# EAGLE board xbee_usb (EAGLE 4.16)
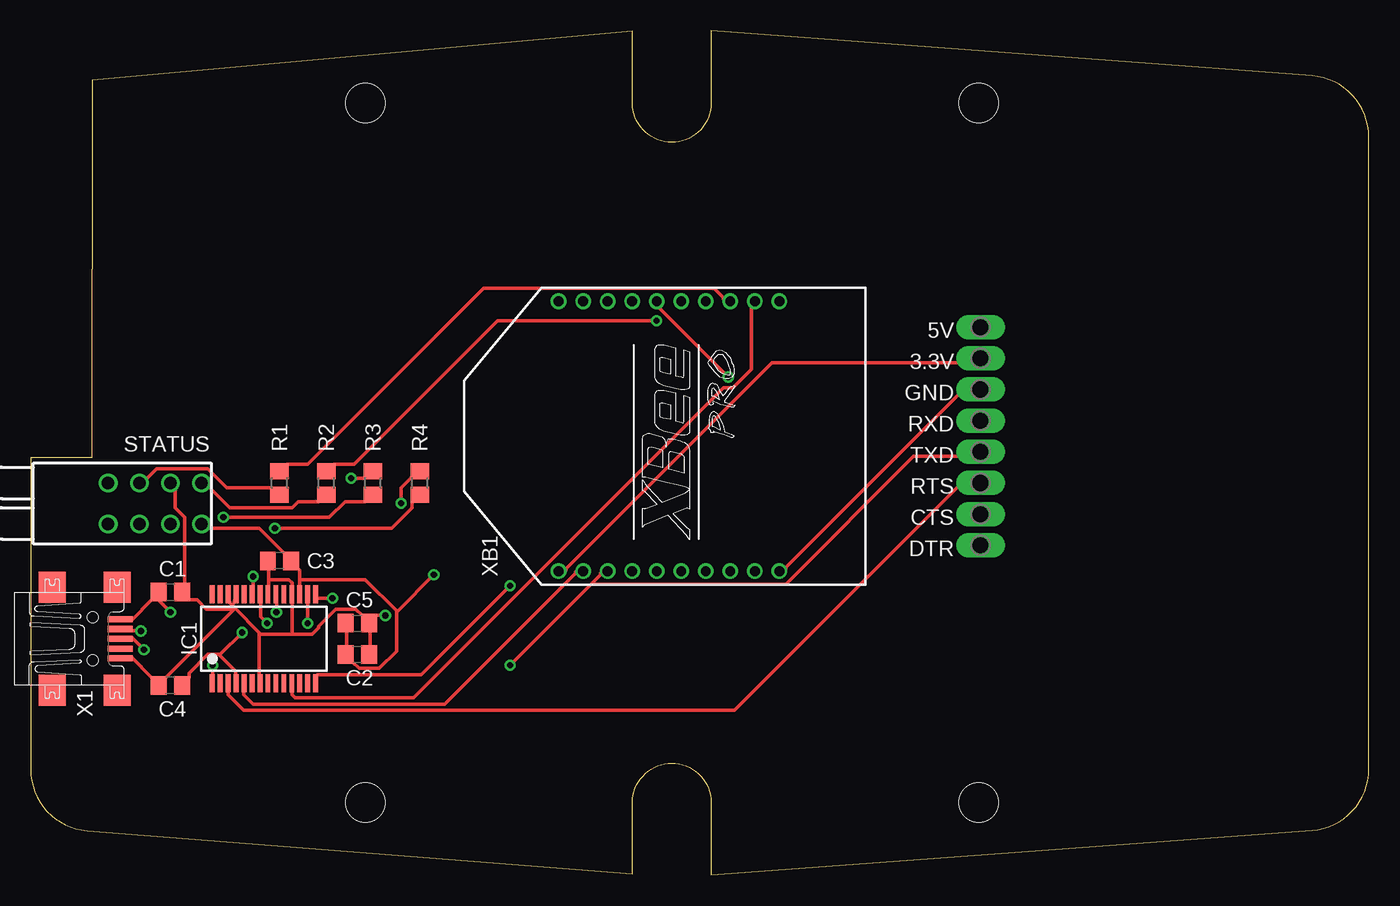
[diagram p0: board, top side]
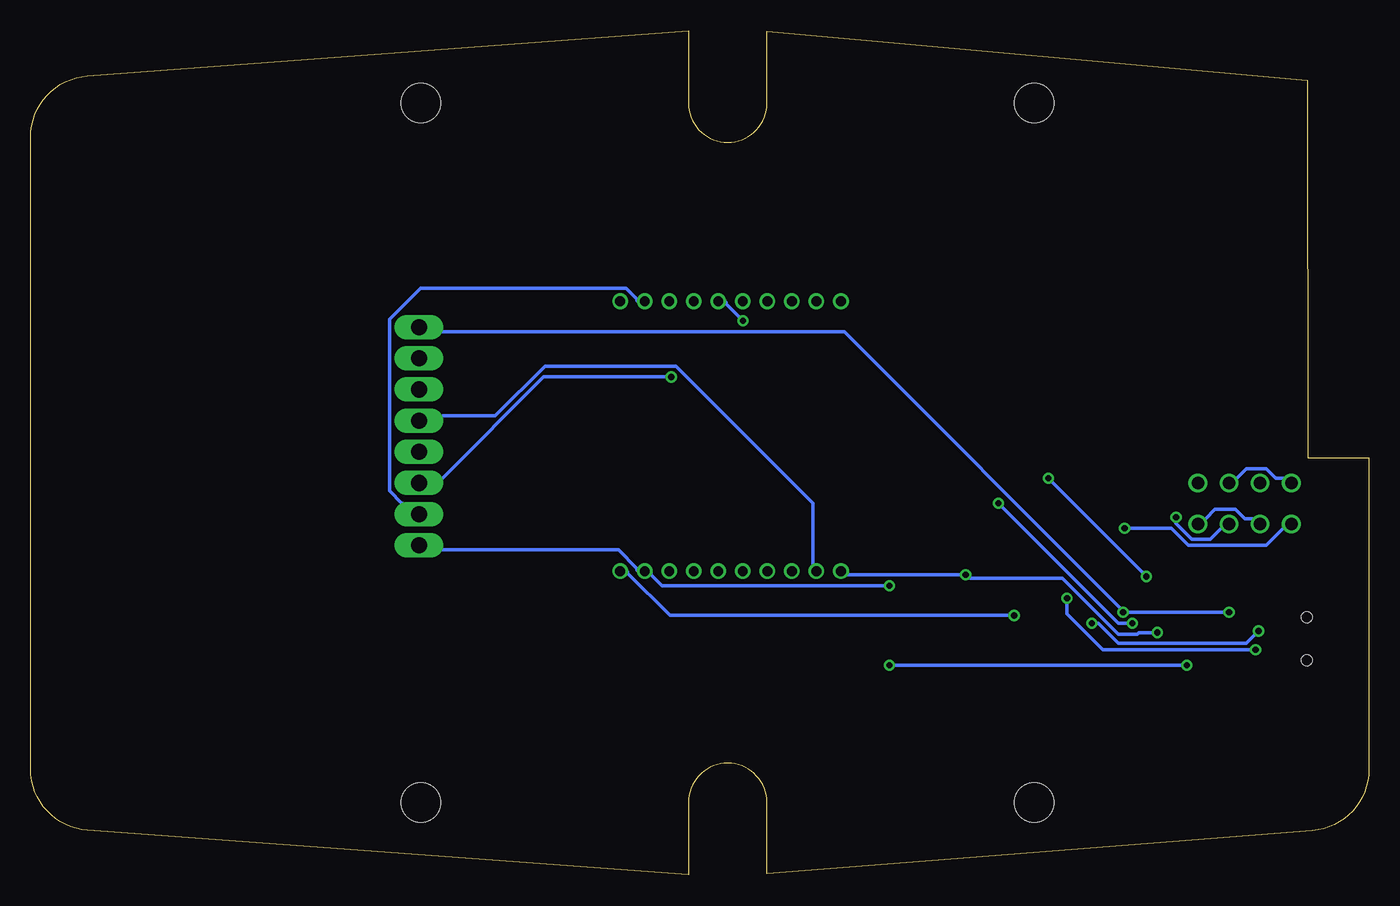
[diagram p1: board, bottom side, seen from below]

Size 109.1 x 68.8 mm. Coordinates in mm from the lower left corner, seen from the top.
Outline: 49.07,0.07 49.07,5.9 arc-90 52.27,9.1 arc-90 55.47,5.9 55.47,0 104.47,3.63 arc86 109.1,8.61 109.1,60.13 arc86 104.47,65.12 55.47,68.8 55.47,62.9 arc-90 52.27,59.7 arc-90 49.07,62.9 49.07,68.77 5,64.77 4.97,34 0,34 0,8.59 arc85 4.6,3.6 49.07,0.07
Copper layers (1*16): Top 0.0178mm / dielectric 1.4986mm / Bottom 0.0178mm
Design rules "Sunstone2layerbeta_v1.1": minimum track width 6mil, minimum drill 14mil, track to track 6mil, track to pad 6mil, pad to pad 6mil, via to via 6mil, smd to smd 6mil, copper to edge 0mil, drill to drill 16mil, minimum pad ring 8mil, minimum via ring 8mil, stop-mask expansion 3mil, vias tented up to drill 0mil, thermal gap 10mil
Net classes: 0 default: width 0.305 mm, drill 0.203 mm, clearance 0.508 mm
Holes 3.2 mm at 27.27,5.9 27.27,62.9 77.27,5.9 77.27,62.9

## Footprints (pad centres in the part's own frame; a part is rotated, then mirrored left to right if it is on the bottom)
P1-13Y = drill 1.321 pad 1.905 long: 1 0,0
C0805 = smd 1.3 x 1.5: 1 -0.95,0; 2 0.95,0
SSOP28 = smd 0.4 x 1.5: 1 -4.225,-3.625; 2 -3.575,-3.625; 3 -2.925,-3.625; 4 -2.275,-3.625; 5 -1.625,-3.625; 6 -0.975,-3.625; 7 -0.325,-3.625; 8 0.325,-3.625; 9 0.975,-3.625; 10 1.625,-3.625; 11 2.275,-3.625; 12 2.925,-3.625; 13 3.575,-3.625; 14 4.225,-3.625; 15 4.225,3.625; 16 3.575,3.625; 17 2.925,3.625; 18 2.275,3.625; 19 1.625,3.625; 20 0.975,3.625; 21 0.325,3.625; 22 -0.325,3.625; 23 -0.975,3.625; 24 -1.625,3.625; 25 -2.275,3.625; 26 -2.925,3.625; 27 -3.575,3.625; 28 -4.225,3.625
R0805 = smd 1.3 x 1.5: 1 -0.95,0; 2 0.95,0
569-010*-* = drill 1.016 round: P$1 3.353,0; P$2 3.353,2.54; P$3 3.353,5.08; P$4 3.353,7.62; P$5 0,0; P$6 0,2.54; P$7 0,5.08; P$8 0,7.62
UX60-MB-5ST = smd 2 x 0.5: 1 2.25,1.6; 2 2.25,0.8; 3 2.25,0; 4 2.25,-0.8; 5 2.25,-1.6 | smd 2.2 x 2.5: M1 -3.3,-4.2; M2 -3.3,4.2; M3 2,4.2; M4 2,-4.2 | hole 0.9: 0,-1.75; 0,1.75
XBEE-PRO = drill 0.8 pad 1.27 round: 1 -11,9; 2 -11,7; 3 -11,5; 4 -11,3; 5 -11,1; 6 -11,-1; 7 -11,-3; 8 -11,-5; 9 -11,-7; 10 -11,-9; 11 11,-9; 12 11,-7; 13 11,-5; 14 11,-3; 15 11,-1; 16 11,1; 17 11,3; 18 11,5; 19 11,7; 20 11,9

## Placement (x,y rotation side)
3.3V  PTR1PAD1-13Y  [P1-13Y]  77.44,42.1 270 top
5V  PTR1PAD1-13Y  [P1-13Y]  77.44,44.64 270 top
C1  10nF  [C0805]  11.4,23.05 0 top
C2  100nF  [C0805]  26.64,17.97 0 top
C3  100nF  [C0805]  20.29,25.59 180 top
C4  100nF  [C0805]  11.4,15.43 180 top
C5  4.7uF  [C0805]  26.64,20.51 0 top
CTS  PTR1PAD1-13Y  [P1-13Y]  77.44,29.4 270 top
DTR  PTR1PAD1-13Y  [P1-13Y]  77.44,26.86 270 top
GND  PTR1PAD1-13Y  [P1-13Y]  77.44,39.56 270 top
IC1  FT232RL  [SSOP28]  19.02,19.24 0 top
R1  [R0805]  20.29,31.94 90 top
R2  [R0805]  24.1,31.94 90 top
R3  [R0805]  27.91,31.94 90 top
R4  [R0805]  31.72,31.94 90 top
RTS  PTR1PAD1-13Y  [P1-13Y]  77.44,31.94 270 top
RXD  PTR1PAD1-13Y  [P1-13Y]  77.44,37.02 270 top
STATUS  569-010-*  [569-010*-*]  6.32,31.94 270 top
TXD  PTR1PAD1-13Y  [P1-13Y]  77.44,34.48 270 top
X1  MINI-USB-UX60-MB-5ST  [UX60-MB-5ST]  5.05,19.24 0 top
XB1  XBEE-PRO  [XBEE-PRO]  52.04,35.75 90 top

## Library data of the parts
3.3V 5V CTS DTR GND RTS RXD TXD = testpad
C1-C5 R1-R4 = rcl
IC1 = ftdichip
STATUS XB1 = radish
X1 = con-hirose

## Nets
GND: C1.2 C2.2 C3.2 C4.2 C5.2 GND.1 IC1.7 IC1.18 IC1.21 IC1.25 IC1.26 STATUS.P$5 STATUS.P$7 X1.5 XB1.10
N$1: IC1.16 X1.2
N$2: IC1.15 X1.3
N$3: R1.1 STATUS.P$6
N$4: IC1.1 TXD.1 XB1.3
N$5: IC1.5 RXD.1 XB1.2
N$6: R1.2 XB1.13
N$7: R2.1 STATUS.P$8
N$11: R2.2 XB1.15
N$13: DTR.1 IC1.14 XB1.9
N$14: IC1.3 RTS.1 XB1.16
N$15: CTS.1 IC1.11 XB1.12
N$16: R4.1 STATUS.P$1
N$17: 5V.1 C1.1 IC1.20 X1.1
N$18: R3.1 STATUS.P$3
N$19: IC1.23 R3.2
N$20: IC1.22 R4.2
VCC: 3.3V.1 C2.1 C3.1 C4.1 C5.1 IC1.4 IC1.17 STATUS.P$2 STATUS.P$4 XB1.1

## Tracks (layer width: path | path; a pad name or v marks a point on that pad's centre or on a via)
GND  (via drill 0.51)
  Top 0.305: GND.1 75.66,39.18 61.56,25.08 61.56,24.95 XB1.10 | X1.5 8.23,17.72 9.88,16.06 C4.2 11.02,16.06 16.48,21.53 16.48,21.65 | 19.4,24.07 19.4,23.56 IC1.21 | 19.4,24.07 19.4,24.95 C3.2 | 19.4,24.07 21.05,24.07 21.31,23.81 21.31,23.56 IC1.18 21.31,22.16 21.31,19.62 | C2.2 27.66,18.61 27.66,19.88 C5.2 | 18.64,19.62 18.64,19.75 16.67,21.72 | 18.64,19.62 18.64,16.32 IC1.7 | 16.42,21.97 16.23,22.16 IC1.26 | 16.67,21.72 16.42,21.97 | IC1.25 16.61,22.16 16.42,21.97 | 16.48,21.65 16.61,21.65 16.67,21.72 | 16.48,21.65 14.32,21.65 13.56,22.41 12.92,22.41 C1.2 12.54,23.68 12.54,29.15 11.78,29.91 11.78,31.3 STATUS.P$7 | 21.31,19.62 22.96,19.62 23.46,20.13 23.46,20.26 24.86,21.65 26.51,21.65 27.02,21.14 C5.2 | 18.64,19.62 21.31,19.62 | v28.93,21.14 28.16,21.14 C5.2
  Bottom 0.305: STATUS.P$5 6.96,32.32 7.59,32.32 8.35,33.08 10,33.08 10.77,32.32 STATUS.P$7 | v28.93,21.14 56.99,21.14 60.42,24.57 60.42,24.7 XB1.10
N$1  (via drill 0.51)
  Top 0.305: v22.58,20.51 22.58,22.16 IC1.16 | v8.99,19.88 8.23,19.88 X1.2
  Bottom 0.305: v22.58,20.51 22.07,20.51 20.42,18.86 10,18.86 v8.99,19.88
N$2  (via drill 0.51)
  Top 0.305: v24.61,22.54 23.34,22.54 IC1.15 | v9.24,18.35 8.23,19.37 X1.3
  Bottom 0.305: v24.61,22.54 24.61,21.27 21.69,18.35 v9.24,18.35
N$3
  Top 0.305: R1.1 19.65,31.56 15.97,31.56 14.45,33.08 10.26,33.08 9.5,32.32 STATUS.P$6
N$4  (via drill 0.51)
  Top 0.305: v14.83,17.08 14.83,16.32 IC1.1 | 45.75,23.75 46.45,24.45 46.45,24.57 XB1.3 | v39.09,17.08 45.75,23.75 | TXD.1 75.53,34.1 71.98,34.1 61.56,23.68 45.82,23.68 45.75,23.75
  Bottom 0.305: v14.83,17.08 v39.09,17.08
N$5
  Top 0.305: IC1.5 17.37,14.92 17.37,14.67 18.13,13.91 33.75,13.91 44.42,24.57 44.42,24.7 XB1.2
  Bottom 0.305: RXD.1 75.53,37.4 71.22,37.4 67.15,41.47 56.48,41.47 45.31,30.29 45.31,25.21 XB1.2
N$6
  Top 0.305: R1.2 20.92,33.46 22.58,33.46 36.93,47.81 55.72,47.81 56.48,47.05 56.48,46.93 XB1.13
N$7
  Top 0.305: R2.1 23.46,30.42 21.81,30.42 21.31,29.91 16.23,29.91 14.58,31.56 STATUS.P$8
N$11  (via drill 0.51)
  Top 0.305: v51.02,45.15 38.07,45.15 26.39,33.46 24.73,33.46 R2.2
  Bottom 0.305: v51.02,45.15 52.42,46.55 52.42,46.67 XB1.15
N$13  (via drill 0.51)
  Top 0.305: v39.09,23.56 31.85,16.32 23.34,16.32 IC1.14
  Bottom 0.305: v39.09,23.56 57.63,23.56 58.52,24.45 58.52,24.57 XB1.9 59.66,24.83 59.66,24.95 61.18,26.48 75.53,26.48 DTR.1
N$14  (via drill 0.51)
  Top 0.305: IC1.3 16.1,14.92 16.1,14.67 17.37,13.4 57.37,13.4 75.53,31.56 RTS.1 | v56.87,40.58 51.28,46.16 51.28,46.29 XB1.16
  Bottom 0.305: v56.87,40.58 67.28,40.58 75.53,32.32 RTS.1
N$15
  Top 0.305: IC1.11 21.31,14.92 21.31,14.67 21.56,14.41 31.21,14.41 56.48,39.69 57.25,39.69 58.77,41.21 58.77,46.29 XB1.12
  Bottom 0.305: CTS.1 78.84,30.29 79.85,31.3 79.85,45.27 77.31,47.81 60.55,47.81 59.66,46.93 59.66,46.8 XB1.12
N$16  (via drill 0.51)
  Top 0.305: v19.91,28.26 29.43,28.26 31.08,29.91 31.08,30.42 R4.1
  Bottom 0.305: v19.91,28.26 16.1,28.26 14.7,26.86 8.35,26.86 6.96,28.26 STATUS.P$1
N$17  (via drill 0.51)
  Top 0.305: X1.1 8.23,20.76 9.88,22.41 C1.1 10.38,22.41 v11.4,21.4 | v20.04,21.4 20.04,22.16 IC1.20
  Bottom 0.305: v11.4,21.4 v20.04,21.4 20.29,21.78 42.77,44.26 75.53,44.26 5V.1
N$18  (via drill 0.51)
  Top 0.305: v15.72,29.15 24.35,29.15 25.62,30.42 27.27,30.42 R3.1
  Bottom 0.305: v15.72,29.15 15.72,28.64 14.45,27.37 12.92,27.37 12.04,28.26 STATUS.P$3
N$19  (via drill 0.51)
  Top 0.305: v18.13,24.32 18.13,23.56 IC1.23 | v26.13,32.32 27.27,32.32 R3.2
  Bottom 0.305: v18.13,24.32 v26.13,32.32
N$20  (via drill 0.51)
  Top 0.305: v19.27,20.51 18.77,21.02 18.77,22.16 IC1.22 | v30.2,30.29 30.2,31.56 31.08,32.45 R4.2
  Bottom 0.305: v19.27,20.51 20.42,20.51 v30.2,30.29
VCC  (via drill 0.51)
  Top 0.305: 15.34,17.97 14.45,17.97 12.92,16.45 12.92,16.06 C4.1 | 15.34,17.97 16.73,16.57 16.73,16.32 IC1.4 | C5.1 25.75,19.88 25.75,18.61 C2.1 26.26,17.34 26.77,16.83 28.42,16.83 29.81,18.22 29.81,21.53 | 21.94,24.07 21.94,24.83 21.81,24.95 C3.1 20.67,26.23 18.64,28.26 14.58,28.26 STATUS.P$4 | 21.94,24.07 21.94,23.56 IC1.17 | 29.81,21.53 27.27,24.07 21.94,24.07 | v32.86,24.45 29.94,21.53 29.81,21.53 | v17.24,19.75 15.46,17.97 15.34,17.97 | 3.3V.1 75.53,41.72 60.42,41.72 43.66,24.95 43.66,24.83 XB1.1
  Bottom 0.305: STATUS.P$2 9.5,29.02 10.13,29.02 10.89,29.78 12.54,29.78 13.31,29.02 STATUS.P$4 | v17.24,19.75 18.77,19.75 18.89,19.62 20.42,19.62 24.99,24.19 32.48,24.19 v32.86,24.45 42.52,24.45 42.52,24.57 XB1.1